# Altium PCB Bop_it_Layout.PcbDoc
Units mil, origin at the board's own origin, x right, y up, seen from the top; angles counter-clockwise.
Board outline 1725 x 1320 mil, 2 copper layers (Top Layer, Bottom Layer); 10 components, 11 nets, 36 pads, 7 vias.
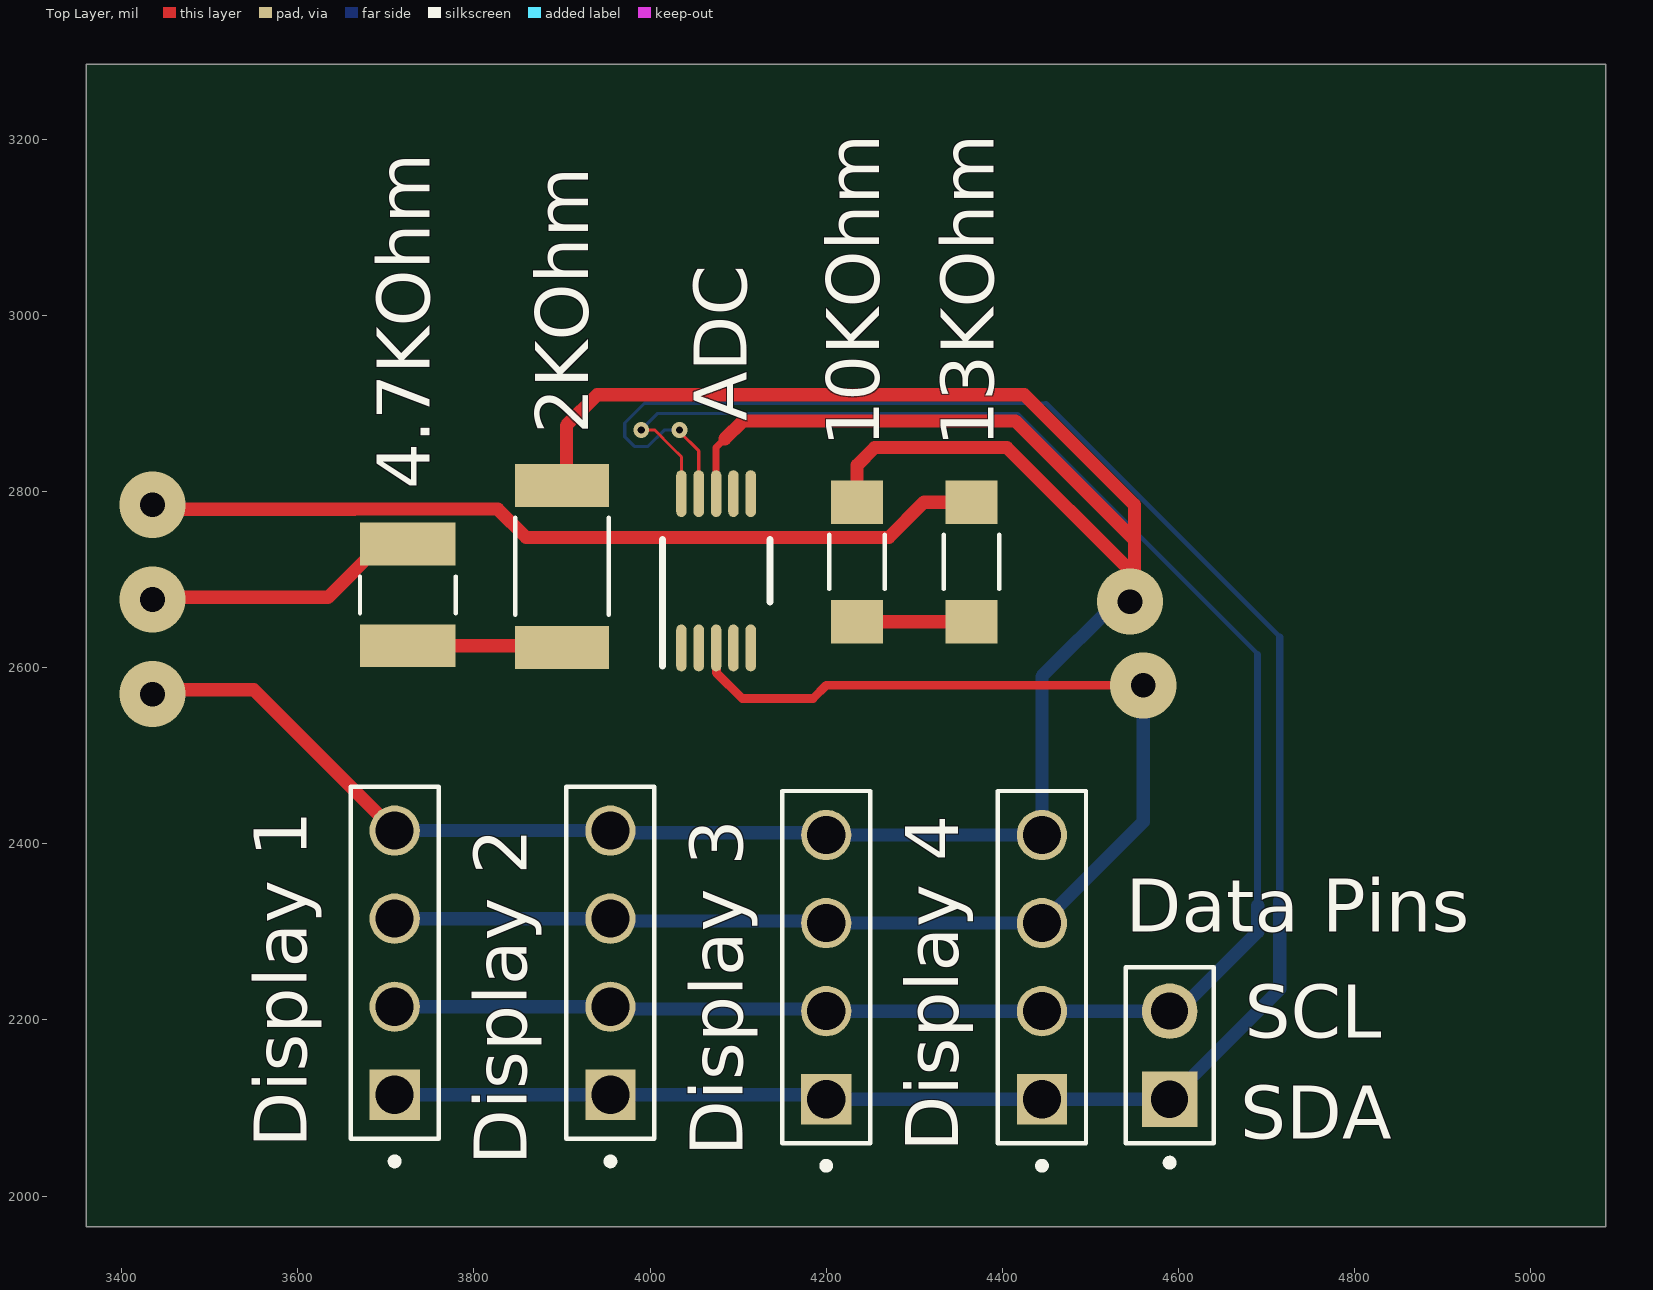
[diagram p0: Top Layer view]
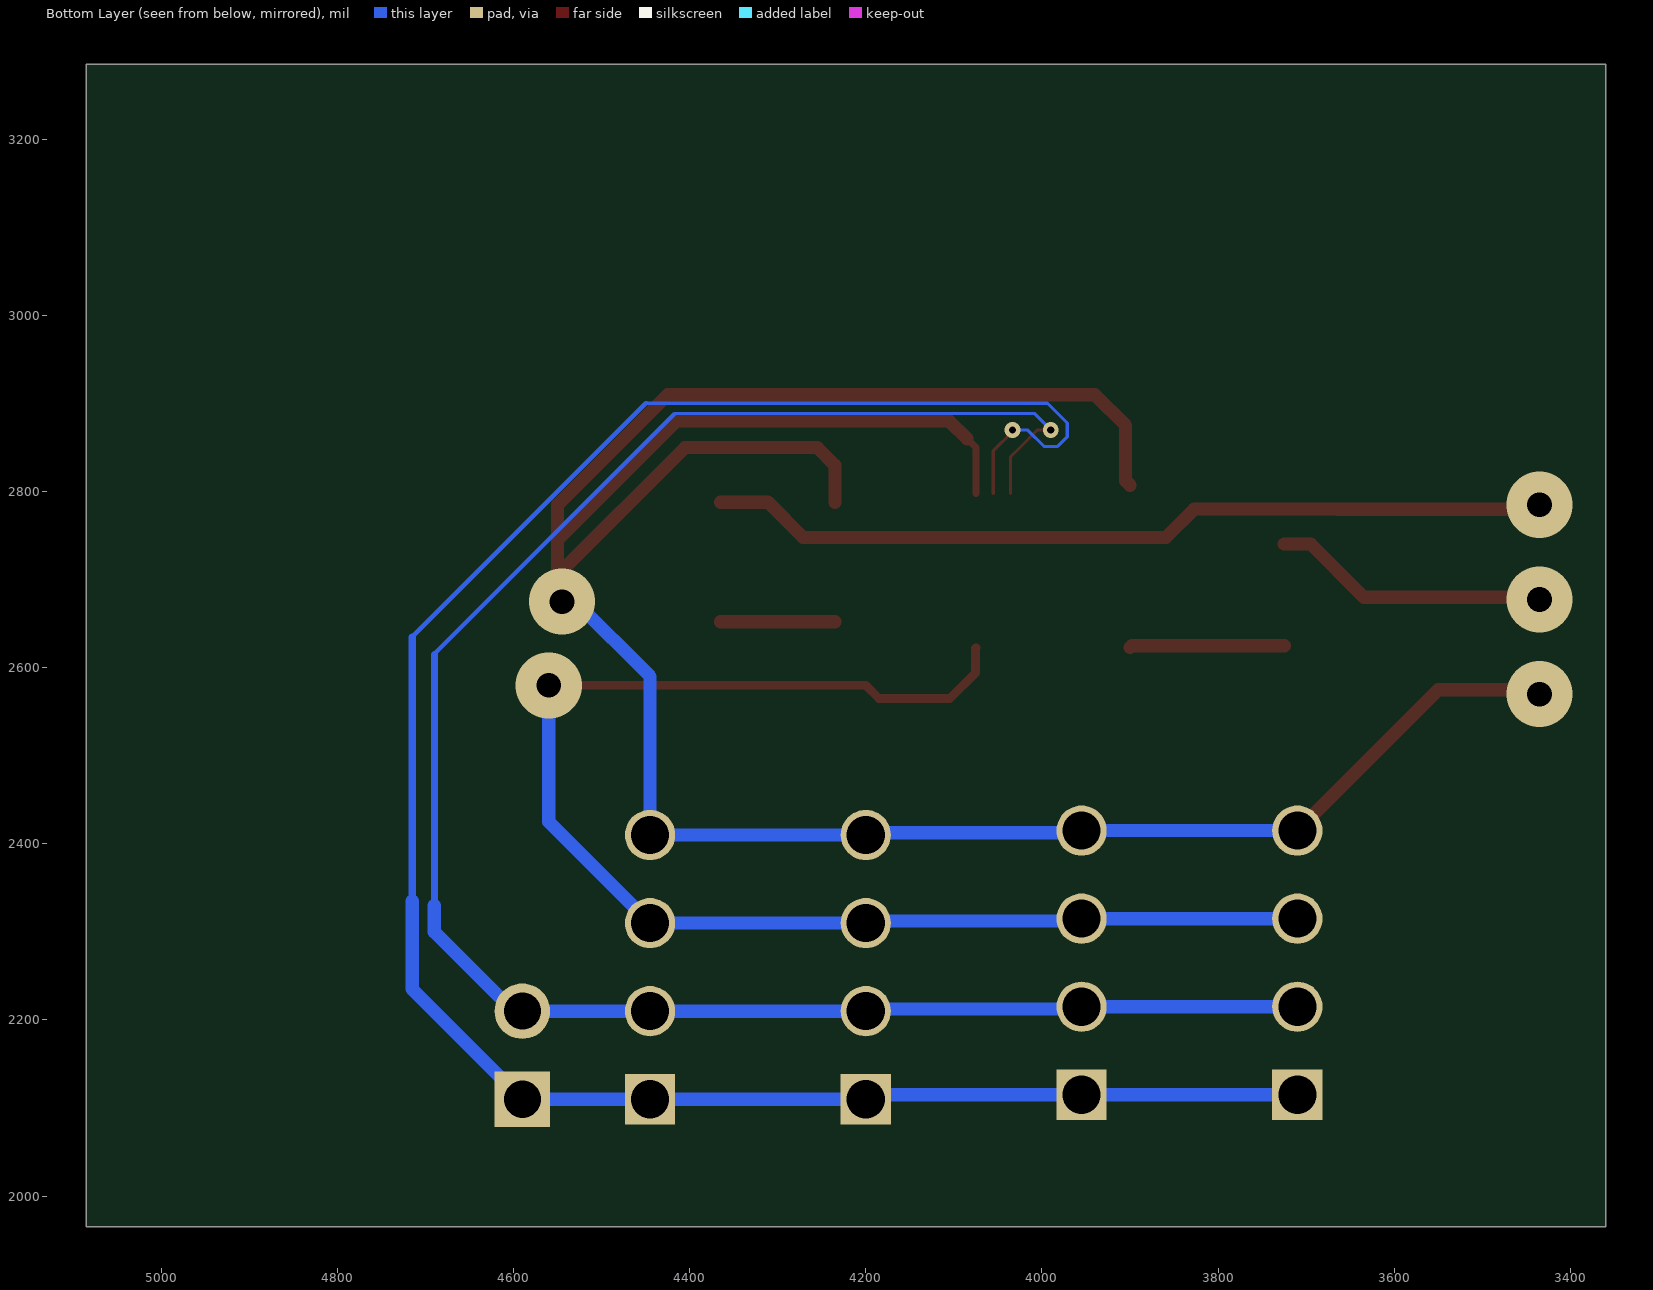
[diagram p1: Bottom Layer view, seen from below]
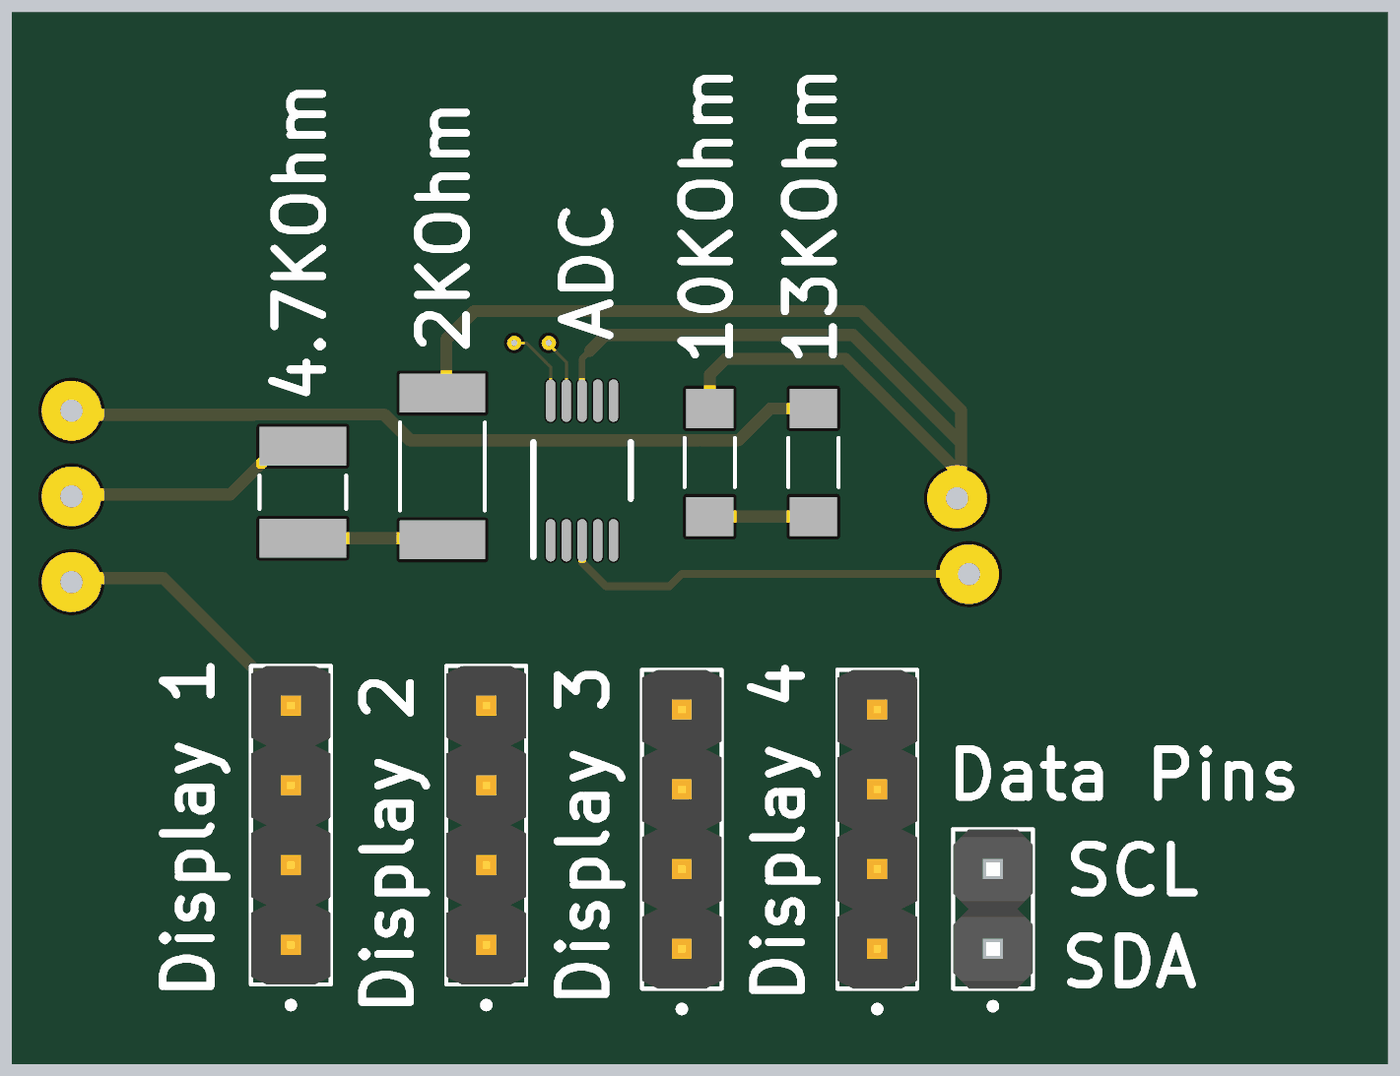
[diagram p2: 3D render of the assembled board from above, using the file's embedded part models]

## Layer stack, top to bottom
Top Solder: solder mask 0.4, Solder Resist, Dk 3.5
Top Layer: signal copper 1.4
Dielectric 1: dielectric 12.6, FR-4, Dk 4.8
Bottom Layer: signal copper 1.4
Bottom Solder: solder mask 0.4, Solder Resist, Dk 3.5

## Board outline
3360,1965 3360,3285 5085,3285 5085,1965

## Design rules (kind name [scope] priority, off if disabled: settings)
BoardOutlineClearance [All] p1: gap=7.87 ignorepadtopadclearanceinfootprint=FALSE except(15.75: Arc-SplitBarrior Arc-SplitContinuation Track-SplitBarrior Track-SplitContinuation SMDPad-SplitBarrior SMDPad-SplitContinuation THPad-SplitBarrior THPad-SplitContinuation Via-SplitBarrior Via-SplitContinuation Fill-SplitBarrior Fill-SplitContinuation Poly-SplitBarrior Poly-SplitContinuation Region-SplitBarrior Region-SplitContinuation Text-SplitBarrior Text-SplitContinuation)
Clearance "Clearance Bottom Layer" [OnLayer('Bottom Layer')] p1: gap=8 ignorepadtopadclearanceinfootprint=TRUE except(10: Arc-Text Track-Text SMDPad-Text THPad-Text Via-Text Fill-Text Poly-Text Region-Text Text-Text)
Clearance "Clearance Top Layer" [OnLayer('Top Layer')] p2: gap=8 ignorepadtopadclearanceinfootprint=TRUE except(10: Arc-Text Track-Text SMDPad-Text THPad-Text Via-Text Fill-Text Poly-Text Region-Text Text-Text)
Clearance [All] p3: gap=7.87 ignorepadtopadclearanceinfootprint=FALSE except(3.5: Arc-Arc Arc-Track Arc-SMDPad Track-Track Track-SMDPad SMDPad-SMDPad; 5: Arc-Via Track-Via SMDPad-Via THPad-Via Via-Via; 10: Arc-Text Track-Text SMDPad-Text THPad-Text Via-Text Fill-Text Poly-Text Region-Text Text-Text)
HoleSize [All] p1: absolutevalues=TRUE maxlimit=248.03 minlimit=7.87 maxpercent=80.000 minpercent=20.000
MinimumAnnularRing [All] p1: minimumring=3
MinimumSolderMaskSliver [All] p1: minsoldermaskwidth=3.8
PolygonConnect PolygonConnect_1 [All] p1: thpad.connectstyle=Relief thpad.reliefconductorwidth=20 thpad.reliefentries=4 thpad.polygonreliefangle="90 Angle" thpad.airgapwidth=10 smdpad.connectstyle=Relief smdpad.reliefconductorwidth=20 smdpad.reliefentries=4 smdpad.polygonreliefangle="90 Angle" smdpad.airgapwidth=10 via.connectstyle=Direct via.reliefconductorwidth=20 via.reliefentries=4 via.polygonreliefangle="90 Angle" via.airgapwidth=10
RoutingCorners [All] p1: cornerstyle=Round minsetback=100 maxsetback=100
RoutingVias [All] p1: holewidth=19.68 width=39.37 viastyle="Through Hole" minholewidth=7.87 minwidth=17.72 maxholewidth=39.37 maxwidth=78.74
SilkToSilkClearance [All] p1: silktosilkclearance=3.94
SilkToSolderMaskClearance [IsPad] p1: minsilkscreentomaskgap=3.94 clearancetoexposedcopper=TRUE
SolderMaskExpansion [All] p1: expansion=4 istentingtop=FALSE
SupplyNets "Schematic Supply Nets_1" [InNet('GND')] p1: voltage=0.000
SupplyNets "Schematic Supply Nets" [InNet('VCC')] p2: voltage=0.000
Width [All] p1: maxlimit=100 minlimit=3.5 preferedwidth=15
25 further rules are at their usual default settings.

## Components (designator, comment, footprint, x,y, rotation, side; value= is the part's Value field where it differs from the comment)
2KOhm "ERJ-12ZYJ202U" RESC5025X70N 3900,2715 r270 top
4.7KOhm "RMCF1210JT4K70" RESC3225X70N 3725,2682.72 r90 top
10KOhm "ERJ8ENF1002V" RES_ERJ8ENF1002V 4235,2720 r90 top
13KOhm "ERJ8ENF1302V" RES_ERJ8ENF1302V 4365,2720 r90 top
ADC "ADS1115IDGST" DGS0010A_N 4075,2710 r90 top
"Data Pins" "M20-9990246" HARWIN_M20-9990246 4590,2160 r90 top
"Display 1" "61300411121" WURTH_61300411121 3710,2265 r90 top
"Display 2" "61300411121" WURTH_61300411121 3955,2265 r90 top
"Display 3" "61300411121" WURTH_61300411121 4200,2260 r90 top
"Display 4" "61300411121" WURTH_61300411121 4445,2260 r90 top

## Footprints (in the part's own frame and the unit in brackets; to place one, negate y for a bottom-side part, rotate by r counter-clockwise, add the part's x,y. Pads: shape width x height; smd on the part's side, far side on the other; paste and mask are expansions set on the pad)
DGS0010A_N [mm]
  oval 1.35x0.3 smd paste+0 mask+0.051: 1(-2.225,1) 2(-2.225,0.5) 3(-2.225,0) 4(-2.225,-0.5) 5(-2.225,-1) 6(2.225,-1) 7(2.225,-0.5) 8(2.225,0) 9(2.225,0.5) 10(2.225,1)
  silkscreen extent -2.75,-1.55 0.9,1.55
HARWIN_M20-9990246 [mm]
  rect 1.605x1.605 / inner round 1.605 / far side rect 1.605x1.605 hole 1.07: 1(-1.27,0)
  round 1.605 hole 1.07: 2(1.27,0)
  silkscreen extent -3.2,-1.27 2.54,1.27, body extent -2.54,-1.27 2.54,1.27, height 8.74
RES_ERJ8ENF1002V [mm]
  rect 1.25x1.5 smd: 1(-1.725,0) 2(1.725,0)
  silkscreen extent -0.78,-0.8 0.78,0.8
RES_ERJ8ENF1302V [mm]
  rect 1.25x1.5 smd: 1(-1.725,0) 2(1.725,0)
  silkscreen extent -0.78,-0.8 0.78,0.8
RESC3225X70N [mm]
  rect 1.23x2.76 smd: 1(-1.466,0) 2(1.466,0)
  silkscreen extent -0.53,-1.38 0.53,1.38
RESC5025X70N [mm]
  rect 1.24x2.72 smd: 1(-2.34,0) 2(2.34,0)
  silkscreen extent -1.4,-1.35 1.4,1.35
WURTH_61300411121 [mm]
  rect 1.45x1.45 / inner round 1.45 / far side rect 1.45x1.45 hole 1.1: 01(-3.81,0)
  round 1.45 hole 1.1: 02(-1.27,0) 03(1.27,0) 04(3.81,0)
  silkscreen extent -5.83,-1.27 5.08,1.27, body extent -5.08,-1.27 5.08,1.27, height 7.27

## Part data
2KOhm 10KOhm 13KOhm: Package=None, Availability=Unavailable, Price=None
  2KOhm: MP=ERJ-12ZYJ202U
  10KOhm: MF="{'manufacturer': u'Panasonic Electronic Components'}", MP=ERJ8ENF1002V
  13KOhm: MP=ERJ8ENF1302V
4.7KOhm: "4.7 kOhms Â±5% 0.333W, 1/3W Chip Resistor 1210 (3225 Metric) Automotive AEC-Q200 Thick Film", Package="3225 Stackpole", Arrow_Electronics-Purchase-URL=https://snapeda.com/shop?store=Arrow+Electronics&id=3964293, Availability=Good, DigiKey-Purchase-URL=https://snapeda.com/shop?store=DigiKey&id=3964293, MF="Stackpole Electronics Inc", MP=RMCF1210JT4K70, Price=None, SnapEDA_Link=https://www.snapeda.com/parts/RMCF1210JT4K70/Stackpole%20Electronics%20Inc/view-part/3964293/?ref=snap
ADC: "16-bit, 860-SPS, 4-channel, delta-sigma ADC with PGA, oscillator, VREF, comparator and I2C 10-VSSOP -40 to 125", Manufacturer_Name="Texas Instruments", Copyright="Copyright (C) 2025 Ultra Librarian. All rights reserved.", Manufacturer_Part_Number=ADS1115IDGST, RefDes=RefDes, TYPE=TYPE
"Data Pins": "2.54mm (0.1) Pitch SIL Vertical Throughboard Pin Header, 6.1mm mating pin height, tin, 2 contacts", Package=None, Check_prices=https://www.snapeda.com/parts/M20-9990246/Harwin/view-part/?ref=eda, MF=Harwin, MP=M20-9990246, SnapEDA_Link=https://www.snapeda.com/parts/M20-9990246/Harwin/view-part/?ref=snap
"Display 1" "Display 2" "Display 3" "Display 4": "Connector Header Through Hole 4 position 0.100 (2.54mm)", Package=None, Check_prices=https://www.snapeda.com/parts/61300411121/W%25C3%25BCrth+Elektronik+Midcom/view-part/?ref=eda, MF="WÃ¼rth Elektronik", MP=61300411121, SnapEDA_Link=https://www.snapeda.com/parts/61300411121/W%25C3%25BCrth+Elektronik+Midcom/view-part/?ref=snap

## Via types
v1: diameter 75/75 (per signal layer), hole 28, Top Layer to Bottom Layer, 5 vias
v2: diameter 18/18 (per signal layer), hole 8, Top Layer to Bottom Layer, 2 vias

## Nets (pads, with @x,y where several pads share a name; then routed paths per layer and width w, separated by ;. In a path a pad name is that pad's centre, name@x,y a point inside that pad or via, vN(x,y) a via of type N, cw(c..) or ccw(c..) an arc to the next point about the centre after c; other vN are vias at no path point)
1.3V: 13KOhm.2 | length 962.1
  Top Layer w15: v1(3435,2785) 3440,2780 3664.1,2780 3664.25,2780.15 3827.11,2780.15 3859.45,2747.81 4270.95,2747.81 4311.05,2787.91 13KOhm.2
2.3V: 4.7KOhm.2 | length 316.1
  Top Layer w15: v1(3435,2677.5) 3437.5,2680 3634.45,2680 3694.88,2740.43 4.7KOhm.2
BLUE: ADC.5
GND: "Display 1.03" "Display 2.03" "Display 3.03" "Display 4.03" ADC.3 | length 1585.9
  Top Layer w10: ADC.3 4075.35,2622.06 4075.35,2594.33 4104.68,2565 4185,2565 4200,2580 v1(4560,2580)
  Bottom Layer w15: 3710,2315 3955,2315 3957.5,2312.5 4197.5,2312.5 4200,2310 4445,2310 4560,2425 v1(4560,2580)
GREEN: ADC.4
Net2KOhm_2: 2KOhm.2 4.7KOhm.1 | length 175.9
  Top Layer w15: 4.7KOhm.1 3897.87,2625 2KOhm.2
Net10KOhm_1: 10KOhm.1 13KOhm.1 | length 130
  Top Layer w15: 10KOhm.1 13KOhm.1
NetADC_9: "Data Pins.1" "Display 1.01" "Display 2.01" "Display 3.01" "Display 4.01" ADC.9 | length 2491.4
  Top Layer w3.5: v2@4033.26,2868.26 4055.31,2846.2 ADC.9
  Bottom Layer w3.5: v2(4033.26,2870) 4016.52,2870 3997.77,2851.25 3982.23,2851.25 3971.25,2862.23 3971.25,2877.77 3993.73,2900.25 4449.75,2900.25
  Bottom Layer w5: 4449.75,2900.25 4715,2635
  Bottom Layer w8: 4715,2335 4715,2635
  Bottom Layer w15: 3710,2115 3955,2115 4195,2115 4200,2110 4445,2110 4590,2110 4715,2235 4715,2335
NetADC_10: "Data Pins.2" "Display 1.02" "Display 2.02" "Display 3.02" "Display 4.02" ADC.10 | length 2256.6
  Top Layer w3.5: v2(3990,2870) 4005,2870 4025.49,2849.51 4035.63,2839.37 ADC.10
  Bottom Layer w3.5: v2(3990,2870) 4008.75,2888.75 4416.77,2888.75 4417.52,2888 ; 4690,2615 4690,2616.27
  Bottom Layer w5: 4417.52,2888 4690,2615.52
  Bottom Layer w8: 4690,2330 4690,2615
  Bottom Layer w15: 3710,2215 3955,2215 3957.5,2212.5 4197.5,2212.5 4200,2210 4445,2210 4600,2210 4690,2300 4690,2330
RED: ADC.6
VCC: 2KOhm.1 10KOhm.2 "Display 1.04" "Display 2.04" "Display 3.04" "Display 4.04" ADC.8 | length 3301
  Top Layer w8: ADC.8 4075,2850 4085,2860
  Top Layer w15: v1(3435,2570) 3440,2575 3550,2575 3710,2415 ; 2KOhm.1 3905,2812.13 3905,2875 3940,2910 4425,2910 4550,2785 4550,2745 ; 4085,2860 4105,2880 4415,2880 4550,2745 ; 10KOhm.2 4235,2830 4255,2850 4405,2850 4545,2710 v1(4545,2675) ; v1@4550,2710 4550,2745
  Bottom Layer w15: 3710,2415 3955,2415 3957.5,2412.5 4197.5,2412.5 4200,2410 4445,2410 4445,2590 4530,2675 v1(4545,2675)
pads on no net: ADC.1 ADC.2 ADC.7

## Silkscreen, mask and mechanical layers (free items; w line width, h text height)
Top Overlay:
  text "SCL" at 4675,2180 h60
  text "SDA" at 4670,2065 h60
Mechanical 1:
  the board outline again, w10